# EAGLE board contra1705 (EAGLE 7.5.0)

Size 152.4 x 114.3 mm. Coordinates in mm from the lower left corner, seen from the top.
Outline: 0,11.68 8.13,11.68 8.13,0 152.4,0 152.4,114.3 8.13,114.3 8.13,102.62 0,102.62 0,11.68
Copper layers (1*16): Top 0.035mm / dielectric 1.5mm / Bottom 0.035mm
Design rules "default": minimum track width 10mil, minimum drill 24mil, track to track 8mil, track to pad 8mil, pad to pad 8mil, via to via 8mil, smd to smd 8mil, copper to edge 40mil, drill to drill 8mil, minimum pad ring 10mil, minimum via ring 8mil, stop-mask expansion 4mil, vias tented up to drill 0mil, thermal gap 10mil

## Footprints (pad centres in the part's own frame; a part is rotated, then mirrored left to right if it is on the bottom)
5MM_TH = drill 0.7 pad 2.54: 1 -2.5,0; 2 2.5,0
AXIAL10X26 = drill 0.8 pad 2.184: P$1 16.51,0; P$2 -16.51,0
DO35-7 = drill 0.813 pad 2.184: A 3.81,0; C -3.81,0
DO-41-10 = drill 1.1 pad 2.184: A 5.08,0; C -5.08,0
MOLEX-WM5238 = drill 1.7 pad 2.184 long: 1 0,0; 2 3.962,0; 3 7.925,0; 4 11.887,0; 5 15.85,0
MOLEX-WM5235 = drill 1.7 pad 2.184 long: 1 0,0; 2 3.962,0
MOLEX-WM5236 = drill 1.7 pad 2.184 long: 1 0,0; 2 3.962,0; 3 7.772,0
44PINEDGE = smd 1.905 x 8.255: 1 -41.605,4.826; 2 -37.643,4.826; 3 -33.68,4.826; 4 -29.718,4.826; 5 -25.756,4.826; 6 -21.793,4.826; 7 -17.831,4.826; 8 -13.868,4.826; 9 -9.906,4.826; 10 -5.944,4.826; 11 -1.981,4.826; 12 1.981,4.826; 13 5.944,4.826; 14 9.906,4.826; 15 13.868,4.826; 16 17.831,4.826; 17 21.793,4.826; 18 25.756,4.826; 19 29.718,4.826; 20 33.68,4.826; 21 37.643,4.826; 22 41.605,4.826 | smd 1.905 x 8.255 bottom: A -41.605,4.826; B -37.643,4.826; C -33.68,4.826; D -29.718,4.826; E -25.756,4.826; F -21.793,4.826; H -17.831,4.826; J -13.868,4.826; K -9.906,4.826; L -5.944,4.826; M -1.981,4.826; N 1.981,4.826; P 5.944,4.826; R 9.906,4.826; S 13.868,4.826; T 17.831,4.826; U 21.793,4.826; V 25.756,4.826; W 29.718,4.826; X 33.68,4.826; Y 37.643,4.826; Z 41.605,4.826
3006P = drill 0.9 pad 2.184: 1 -6.477,1.27; 2 1.143,-1.27; 3 6.223,1.27
0207/10 = drill 0.9 pad 2.184: 1 -5.08,0; 2 5.08,0
0309/12 = drill 0.9 pad 2.184: 1 -6.35,0 | drill 0.813 pad 2.184: 2 6.35,0

## Placement (x,y rotation side)
C1  0.01UF  [5MM_TH]  43.18,60.96 90 top
C2  22 uF  [AXIAL10X26]  82.55,62.23 0 top
C3  22 uF  [AXIAL10X26]  82.55,43.18 0 top
C4  0.01UF  [5MM_TH]  127,52.07 180 top
D1  1N4148  [DO35-7]  73.66,92.71 0 top
D2  1N4005  [DO-41-10]  27.94,43.18 0 top
D3  1N4005  [DO-41-10]  39.37,30.48 0 top
D16  1N4148  [DO35-7]  92.71,86.36 0 top
J1  WM5238  [MOLEX-WM5238]  129.54,40.64 270 top
J2  WM5235  [MOLEX-WM5235]  129.54,13.97 270 top
J3  WM5236  [MOLEX-WM5236]  129.54,86.36 270 top
P1  44PINEDGE  [44PINEDGE]  0,57.15 270 top
P2  5K  [3006P]  139.7,102.87 0 top
P3  1M  [3006P]  139.7,63.5 0 top
R3  8.2K  [0207/10]  34.29,93.98 180 top
R4  220K  [0207/10]  31.75,53.34 180 top
R5  18K  [0207/10]  72.39,31.75 0 top
R6  0.33  [0309/12]  49.53,19.05 270 top
R7  0.33  [0309/12]  59.69,19.05 270 top
R8  0.33  [0309/12]  69.85,19.05 270 top
R9  0.33  [0309/12]  78.74,19.05 270 top
R10  0.33  [0309/12]  87.63,19.05 270 top
R11  0.33  [0309/12]  97.79,19.05 270 top
R12  0.33  [0309/12]  106.68,19.05 270 top
R13  0.33  [0309/12]  116.84,19.05 270 top
ZD1  1N754A  [DO35-7]  55.88,93.98 180 top
ZD2  1N5271  [DO35-7]  54.61,55.88 180 top
ZD3  1N5271  [DO35-7]  53.34,49.53 0 top
ZD4  BZX79-C56  [DO35-7]  93.98,31.75 180 top
ZD5  BZX79-C56  [DO35-7]  113.03,31.75 180 top

## Library data of the parts
C1 C4 D1-D3 D16 J1-J3 P1 R3-R13 ZD1-ZD5 = keiths
C2 C3 = keiths; PN: TVX2C220MCD
P2 P3 = keiths; PN: 3006W-1-200LF

## Nets
6.3_VAC_1: J2.1 R6.2
6.3_VAC_2: J1.5 J2.2
+50V: D16.A P1.E
+265V: J3.1 R4.1
-150V: D2.C J3.3 P1.V
BASE: P1.K P2.2
CATHODE: D3.C J1.2 P1.Y
GND: C1.2 C2.P$1 C3.P$1 C4.2 J3.2 P1.D P3.1 R3.2 ZD2.A ZD5.C
GRID1: C4.1 D3.A J1.3 P3.2
GRID2: C1.1 J1.1 R4.2 ZD3.C
HEATER: J1.4 R13.1
N$1: ZD4.C ZD5.A
N$2: ZD2.C ZD3.A
N$3: D1.C P2.3 ZD1.C
N$4: D1.A D16.C
N$5: R6.1 R7.2
N$6: P2.1 R3.1 ZD1.A
N$7: P3.3 R5.2 ZD4.A
N$8: C2.P$2 C3.P$2 D2.A R5.1
N$9: R7.1 R8.2
N$10: R8.1 R9.2
N$11: R9.1 R10.2
N$12: R10.1 R11.2
N$13: R11.1 R12.2
N$14: R12.1 R13.2

## Tracks (layer width: path | path; a pad name or v marks a point on that pad's centre or on a via)
6.3_VAC_1  (1 unrouted)
6.3_VAC_2  (1 unrouted)
+50V  (1 unrouted)
+265V  (1 unrouted)
-150V  (2 unrouted)
BASE  (1 unrouted)
CATHODE  (2 unrouted)
GND  (9 unrouted)
GRID1  (3 unrouted)
GRID2  (3 unrouted)
HEATER  (1 unrouted)
N$1  (1 unrouted)
N$2  (1 unrouted)
N$3  (2 unrouted)
N$4  (1 unrouted)
N$5  (1 unrouted)
N$6  (2 unrouted)
N$7  (2 unrouted)
N$8  (3 unrouted)
N$9  (1 unrouted)
N$10  (1 unrouted)
N$11  (1 unrouted)
N$12  (1 unrouted)
N$13  (1 unrouted)
N$14  (1 unrouted)